# Altium PCB Notch_PCB.PcbDoc
Units mm, origin at the board's own origin, x right, y up, seen from the top; angles counter-clockwise.
Board outline 50 x 50 mm, 2 copper layers (Top Layer, Bottom Layer); 8 components, 5 nets, 16 pads, 0 vias.
Unrouted connection lines stored in the file: 1.
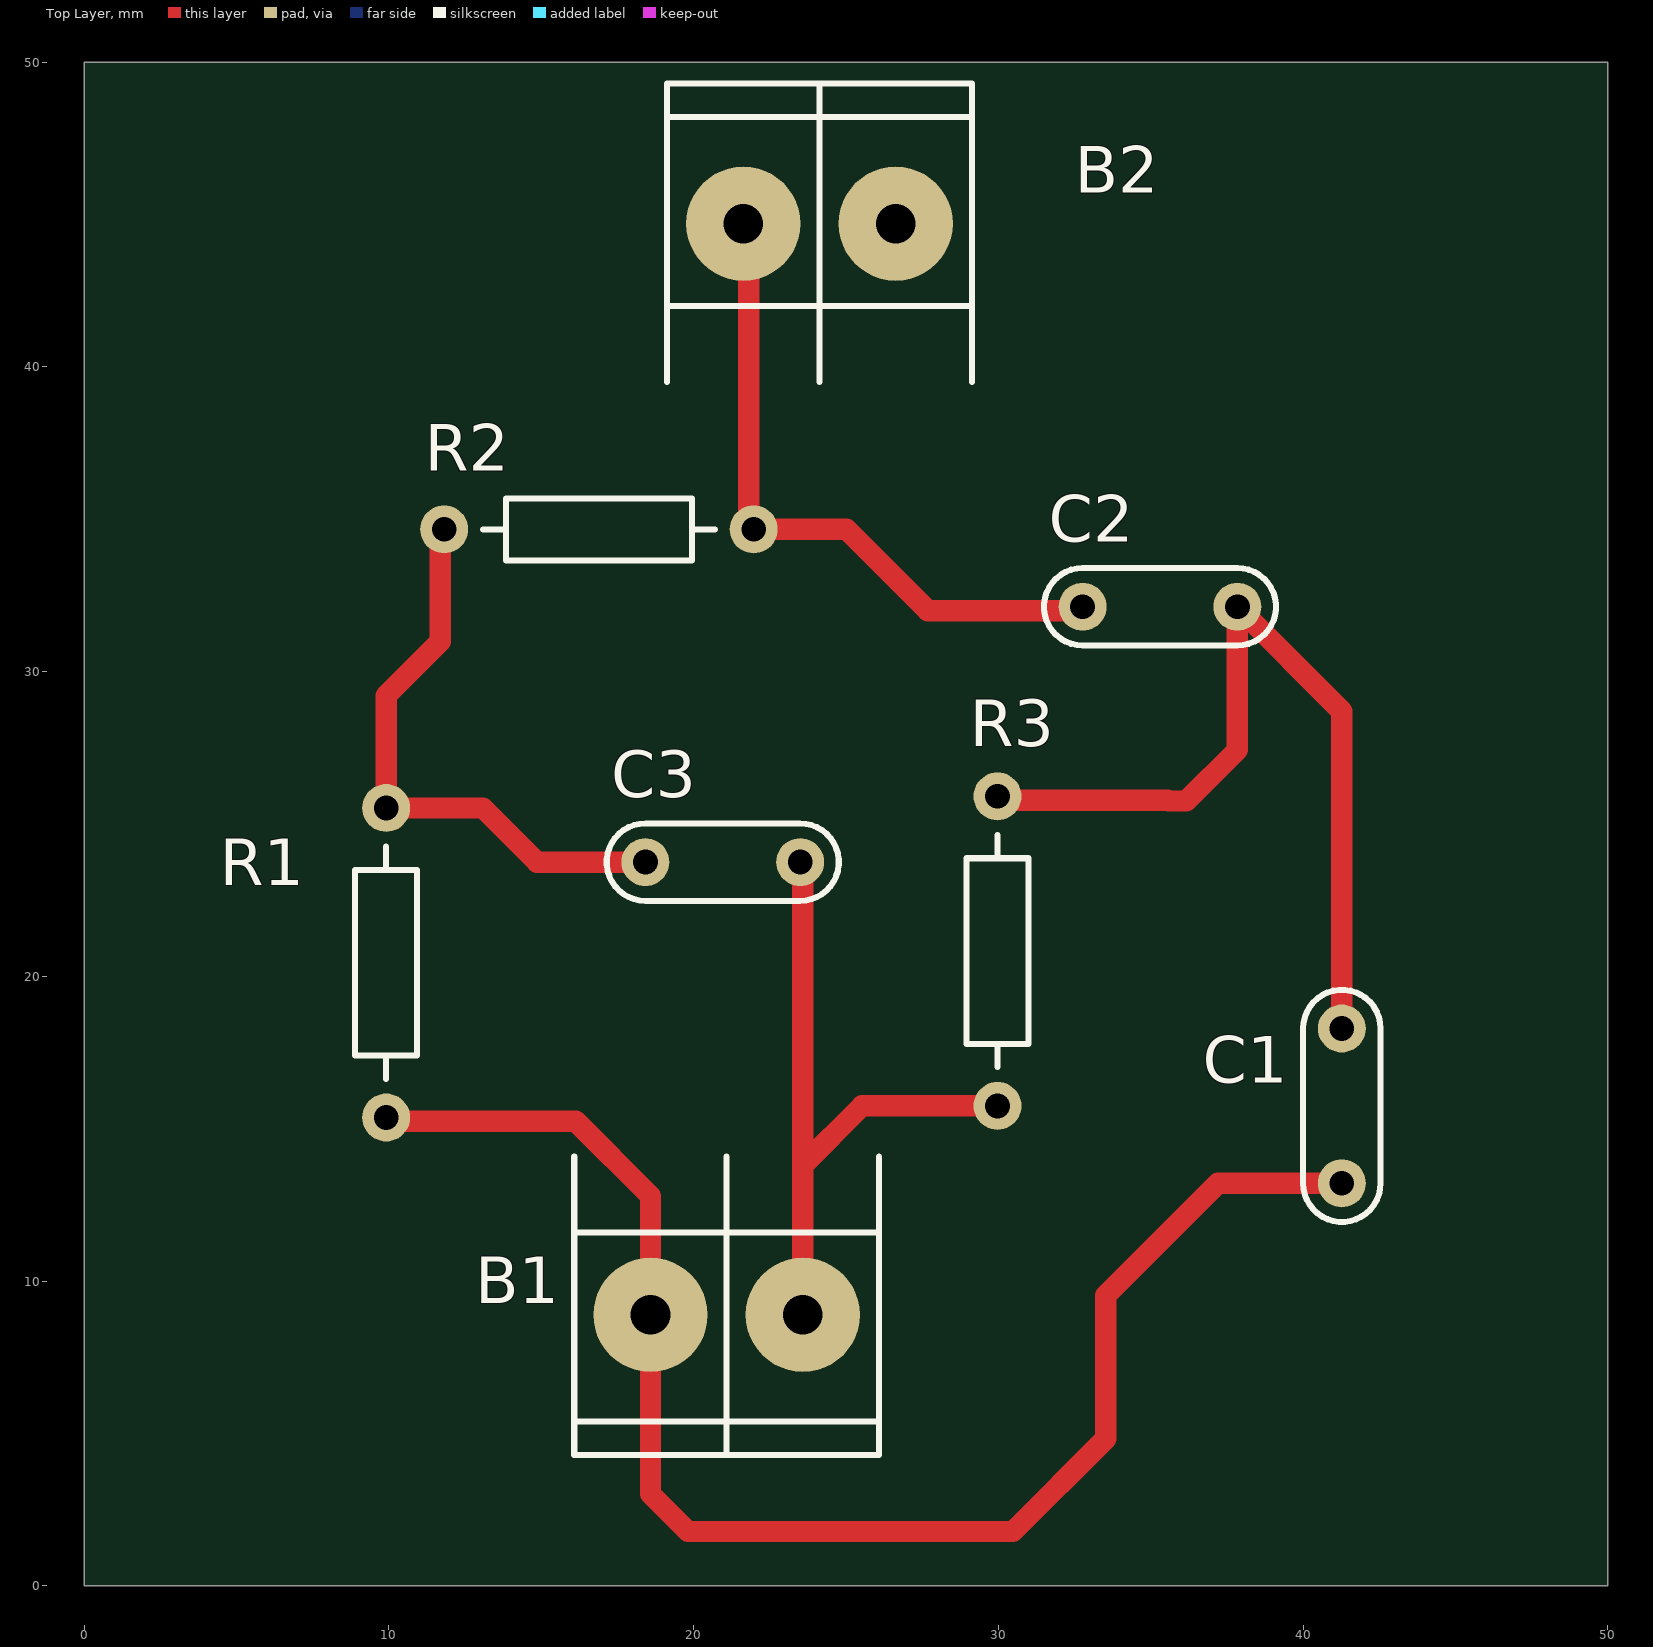
[diagram p0: Top Layer view]
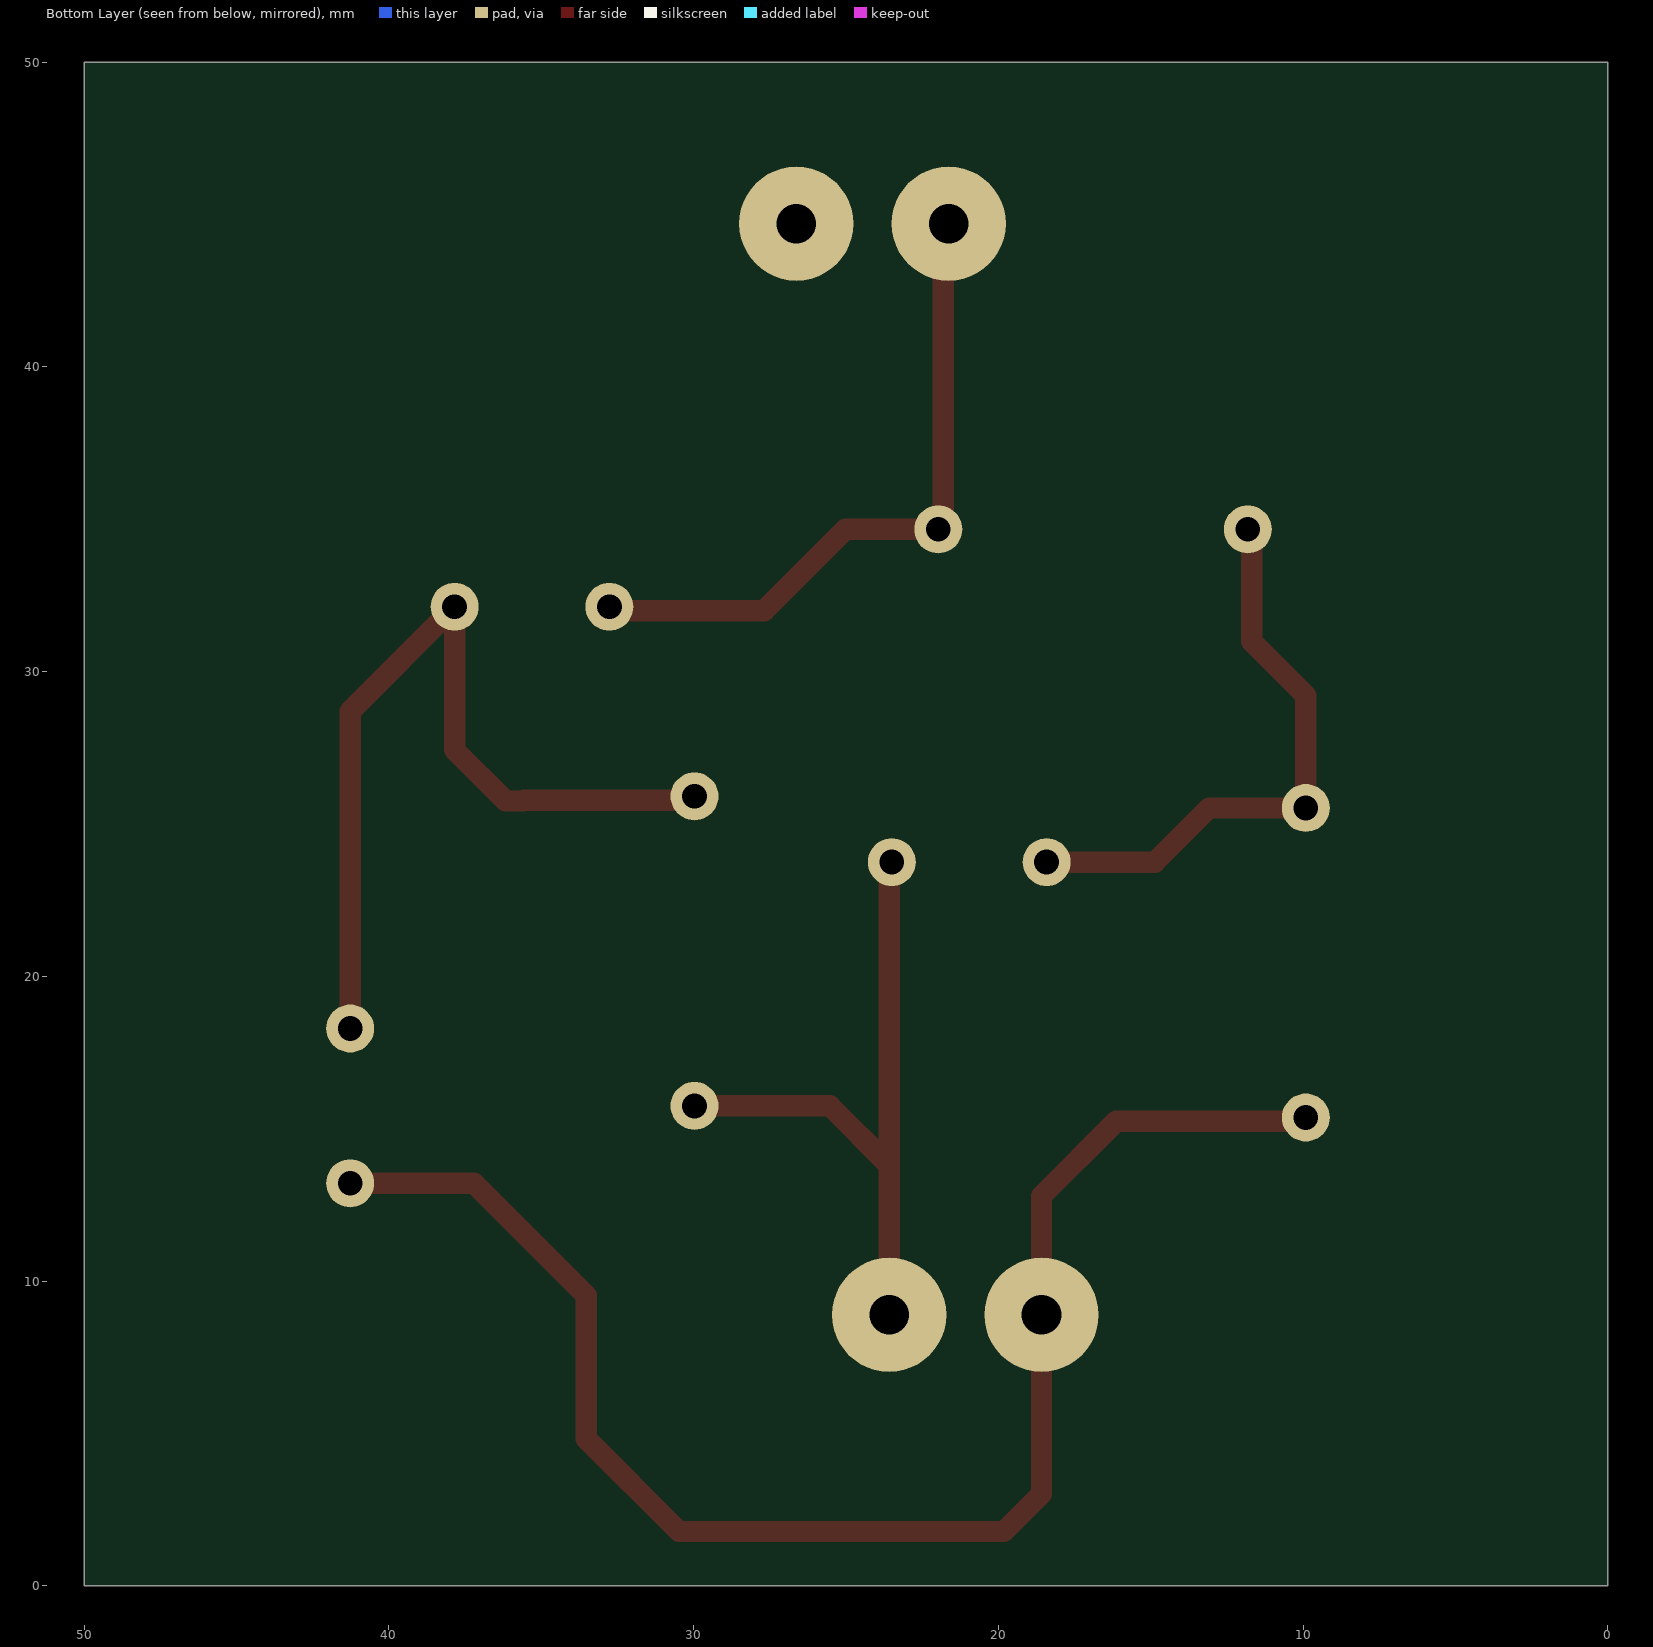
[diagram p1: Bottom Layer view, seen from below]
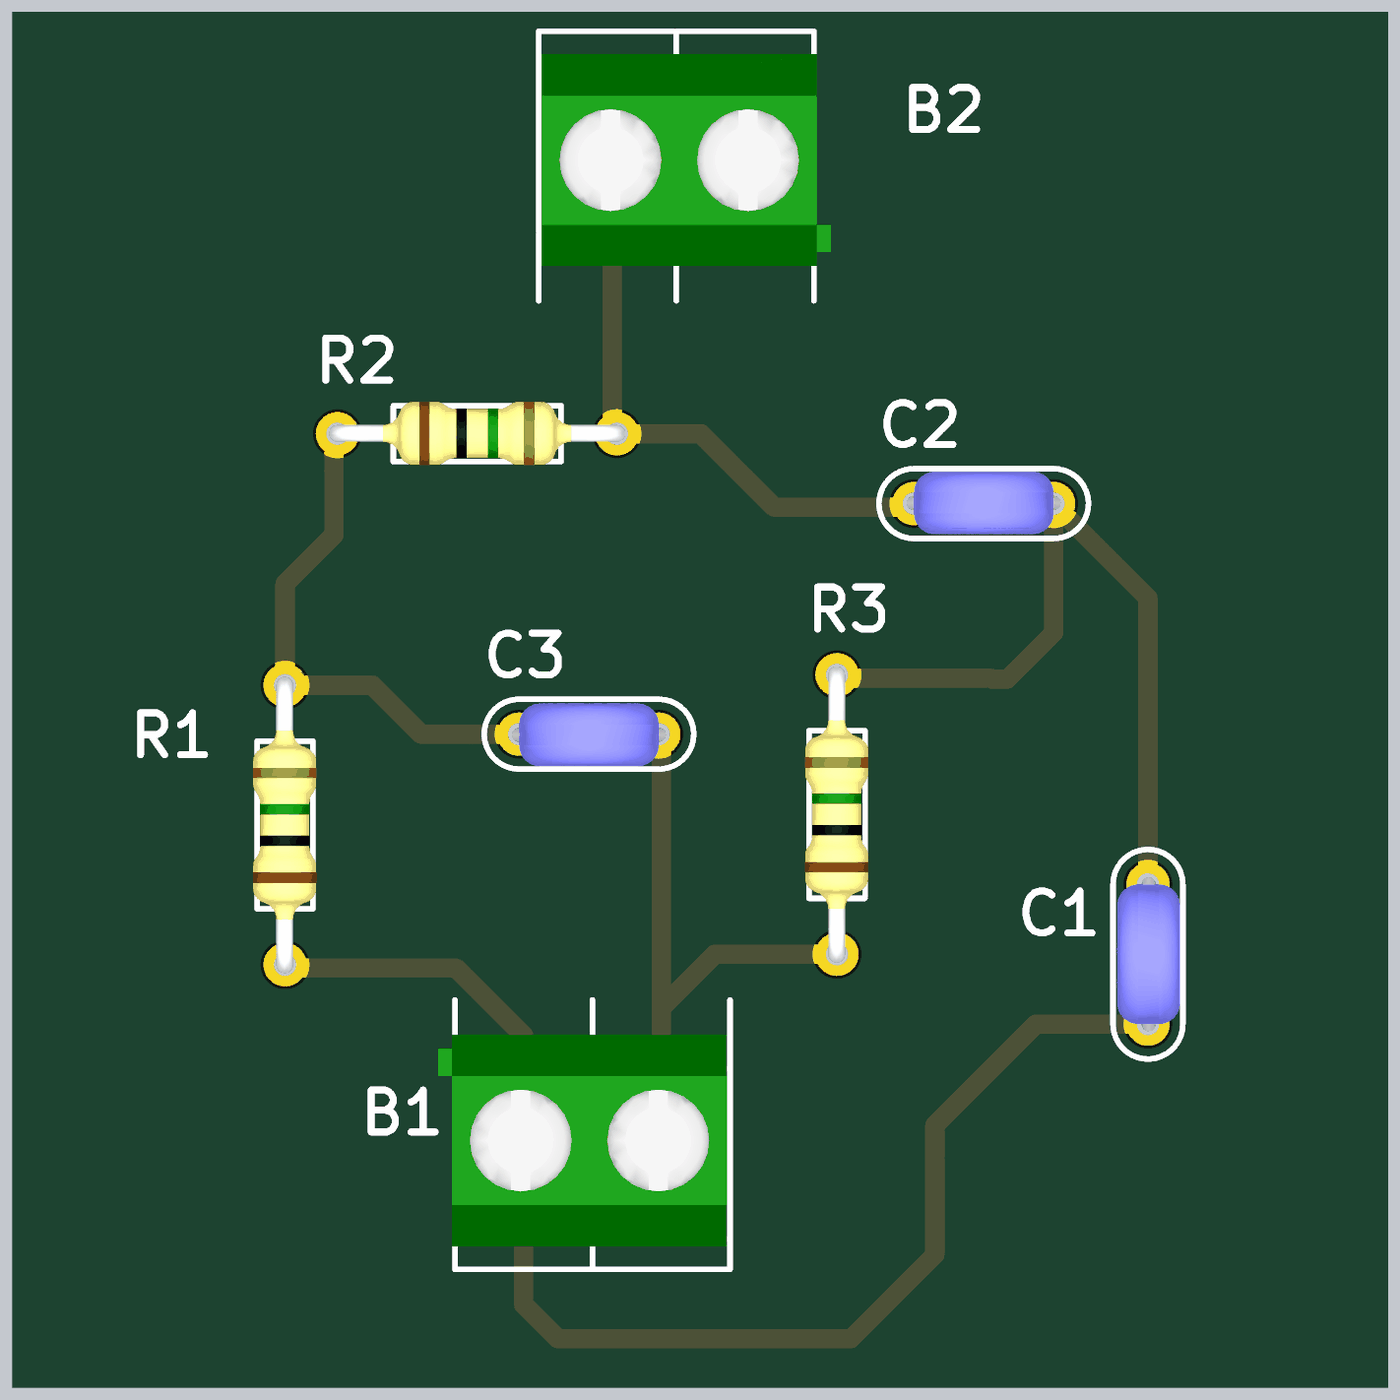
[diagram p2: 3D render of the assembled board from above, using the file's embedded part models]

## Layer stack, top to bottom
Top Solder: solder mask 0.0102, Solder Resist, Dk 3.5
Top Layer: signal copper 0.0356
Dielectric 1: dielectric 0.32, FR-4, Dk 4.8
Bottom Layer: signal copper 0.0356
Bottom Solder: solder mask 0.0102, Solder Resist, Dk 3.5

## Board outline
0,0 0,50 50,50 50,0

## Design rules (kind name [scope] priority, off if disabled: settings)
Clearance [All] p1: gap=0.254 ignorepadtopadclearanceinfootprint=FALSE except(0: Arc-Hole Track-Hole SMDPad-Hole THPad-Hole Via-Hole Fill-Hole Poly-Hole Region-Hole Text-Hole)
PolygonConnect [All] p1: connectstyle=Relief reliefconductorwidth=0.254 reliefentries=4 polygonreliefangle="90 Angle" airgapwidth=0.254
RoomDefinition Notch_schematic [InComponentClass('Notch_schematic')] p1: confinementstyle=ConfineIn formatcopy=TRUE lockcomponents=FALSE outline 51.435,16.129 98.298,16.129 98.298,30.861 51.435,30.861
RoutingVias [All] p1: holewidth=0.711 width=1.27 viastyle="Through Hole" minholewidth=0.711 minwidth=1.27 maxholewidth=0.711 maxwidth=1.27
SolderMaskExpansion [All] p1: expansion=0.102 istentingtop=FALSE
Width [All] p1: maxlimit=0.9 minlimit=0.6 preferedwidth=0.7
30 further rules are at their usual default settings.

## Components (designator, comment, footprint, x,y, rotation, side; value= is the part's Value field where it differs from the comment)
B1 "BORNERA 2" BORNERA2 21.082,8.89 r90 top
B2 "BORNERA 2" BORNERA2 24.13,44.704 r270 top
C1 "18nF" CAP200 41.275,15.748 r90 top
C2 "18nF" CAP200 35.306,32.131 r180 top
C3 "39nF" CAP200 20.955,23.749 r0 top
R1 "3k3" RES400 9.906,15.367 r90 top
R2 "3k3" RES400 11.811,34.671 r0 top
R3 "1k5" RES400 29.972,15.748 r90 top

## Footprints (in the part's own frame and the unit in brackets; to place one, negate y for a bottom-side part, rotate by r counter-clockwise, add the part's x,y. Pads: shape width x height; smd on the part's side, far side on the other; paste and mask are expansions set on the pad)
BORNERA2 [mm] "Bornera con Tornillos 5mm separación"
  round 3.75 hole 1.3: 1(0,2.5) 2(0,-2.5)
  silkscreen extent -4.6,-5 5.2,5, body extent -3.76,-4.89 3.94,5.61, height 10
CAP200 [mil]
  round 62 hole 32: 1(-100,0) 2(100,0)
  silkscreen extent -150,-50 150,50, body extent -110,-46 110,44, height 246
RES400 [mil]
  round 62 hole 32: 1(0,0) 2(400,0)
  silkscreen extent 50,-40 350,40, body extent -12,-45 412,46, height 96

## Part data
C1 C2 C3: library part CAP
R1 R2 R3: library part RES

## Nets (pads, with @x,y where several pads share a name; then routed paths per layer and width w, separated by ;. In a path a pad name is that pad's centre, name@x,y a point inside that pad or via, vN(x,y) a via of type N, cw(c..) or ccw(c..) an arc to the next point about the centre after c; other vN are vias at no path point)
GND: B1.2 B2.1 C3.2 R3.1 | length 22.1
  Top Layer w0.7: C3.2 23.582,23.662 23.582,13.803 ; B1.2 23.582,13.803 ; R3.1 25.527,15.748 23.582,13.803
NetB1_1: B1.1 C1.1 R1.1 | length 50.2
  Top Layer w0.7: R1.1 10.033,15.24 16.129,15.24 18.582,12.787 B1.1 18.582,3.008 19.812,1.778 30.48,1.778 33.528,4.826 33.528,9.525 37.211,13.208 C1.1
NetB2_2: B2.2 C2.2 R2.2 | length 22.1
  Top Layer w0.7: B2.2 21.804,44.53 21.804,34.838 R2.2 25.019,34.671 27.686,32.004 32.639,32.004 C2.2
NetC1_2: C1.2 C2.1 R3.2 | length 28.6
  Top Layer w0.7: R3.2 30.099,25.781 35.56,25.781 35.588,25.753 36.167,25.753 37.846,27.432 C2.1 41.275,28.702 C1.2
NetC3_1: C3.1 R1.2 R2.1 | length 19.2
  Top Layer w0.7: R2.1 11.684,34.544 11.684,30.988 9.906,29.21 R1.2 13.081,25.527 14.859,23.749 C3.1